# Altium PCB ESP32 with USBC PCB.PcbDoc
Units mil, origin at the board's own origin, x right, y up, seen from the top; angles counter-clockwise.
Board outline 2700 x 1000 mil, 4 copper layers (L1, L2, L3, L4), stack 61.583 mil thick; 64 components, 73 nets, 299 pads, 160 vias.
Unrouted connection lines stored in the file: 1.
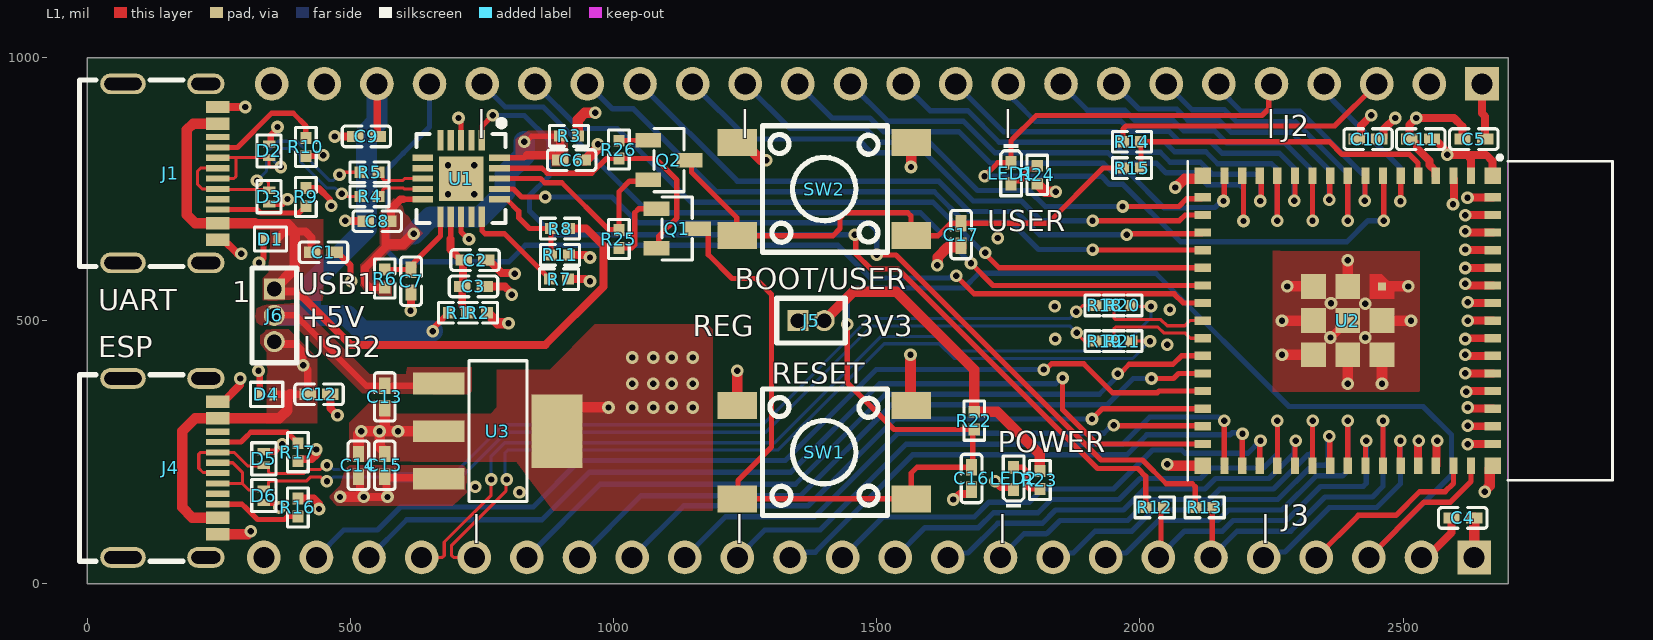
[diagram p0: L1 view]
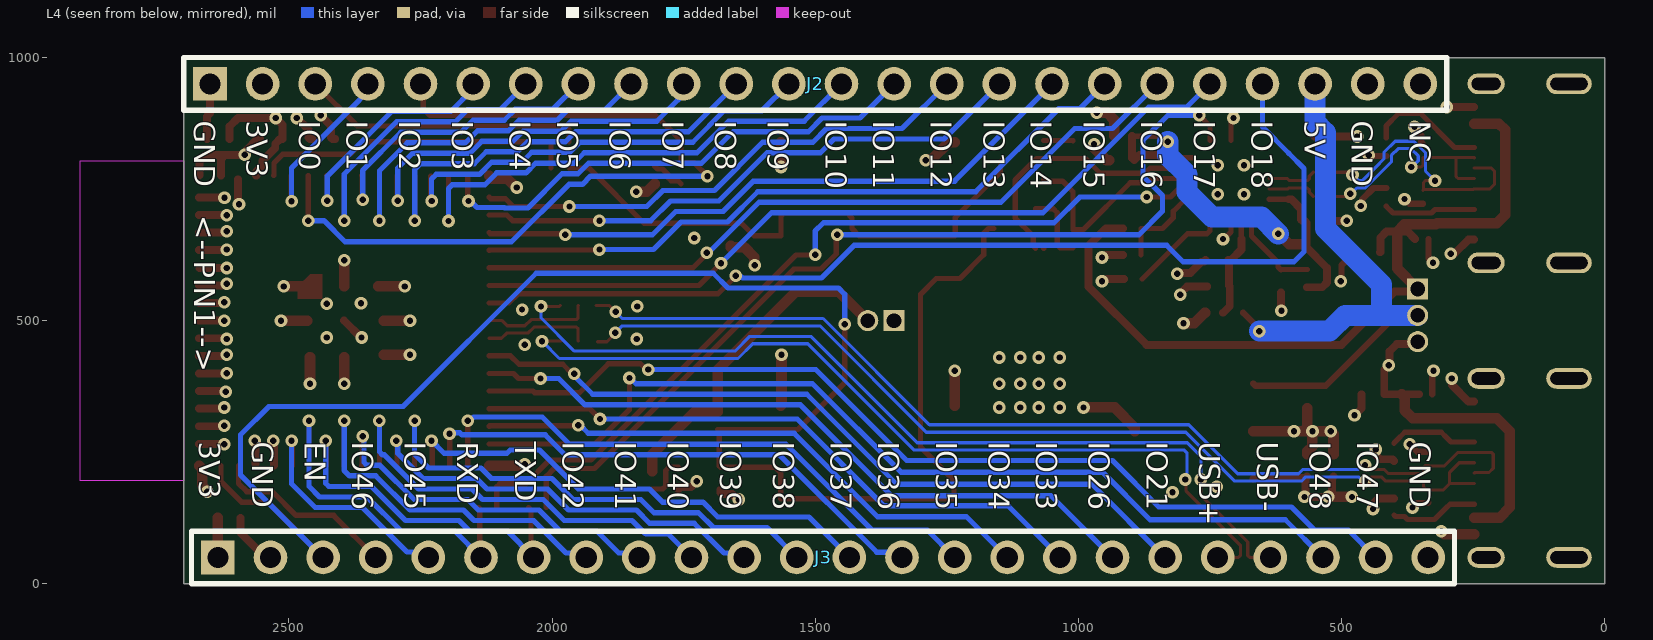
[diagram p1: L4 view, seen from below]
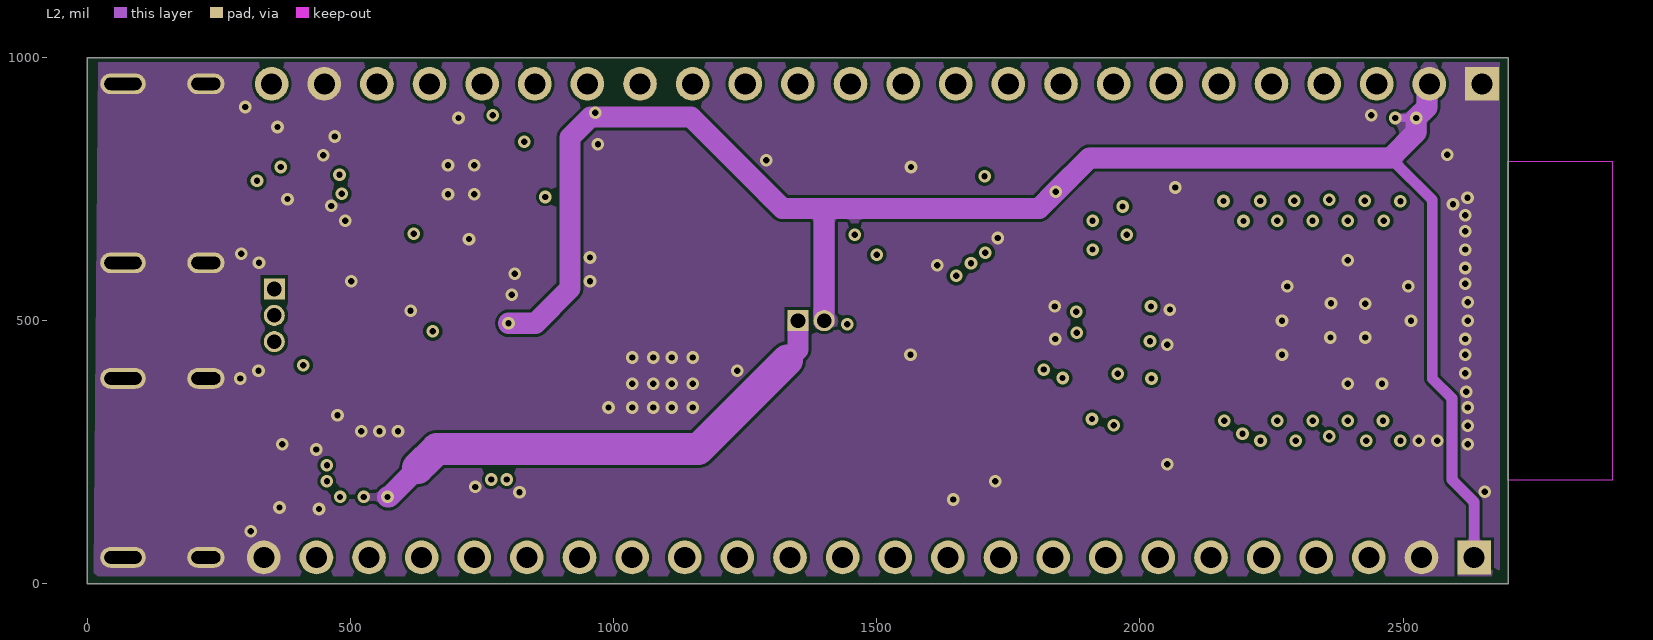
[diagram p2: L2]
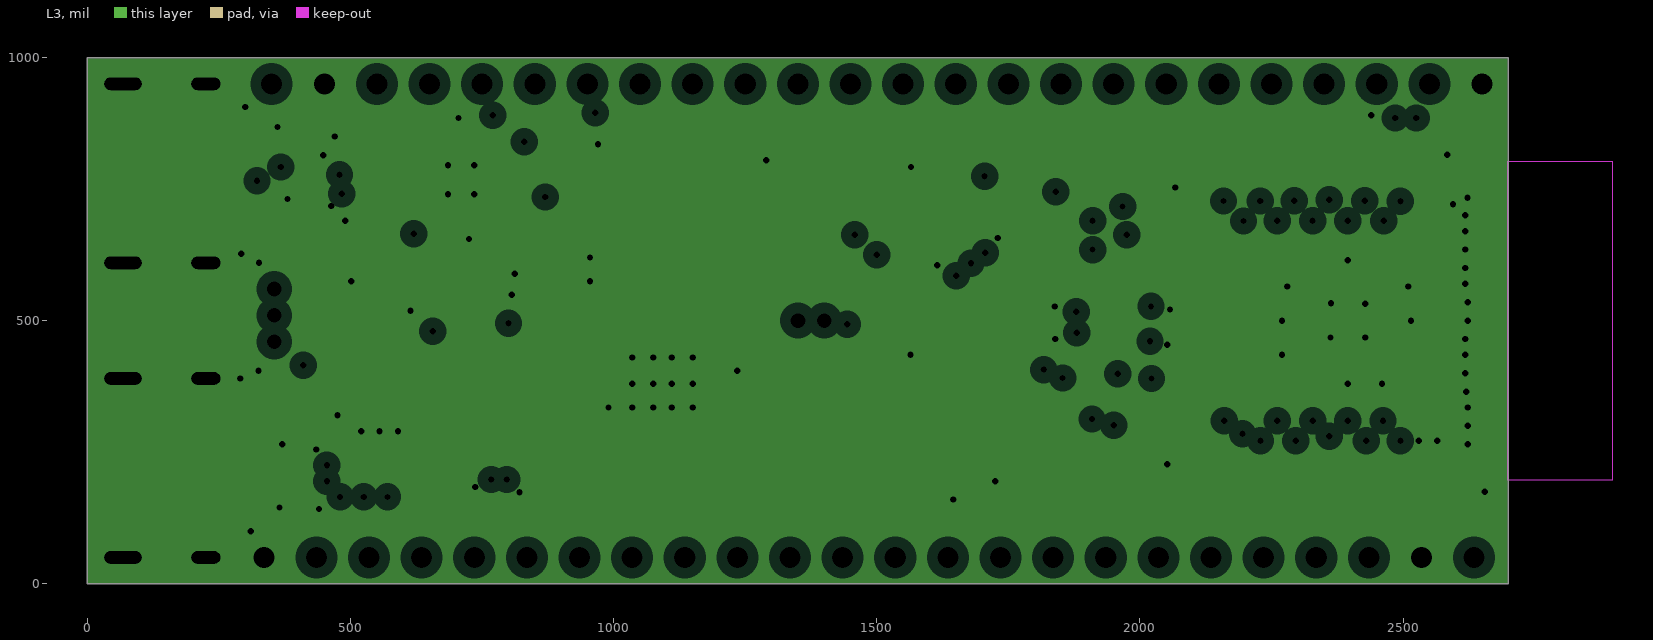
[diagram p3: L3, clearances drawn from the general rule]

## Layer stack, top to bottom
Top Solder: solder mask 0.4, Solder Resist, Dk 3.5
L1: signal copper 1.378
Dielectric 2: prepreg 3.9134, PP-006, Dk 4.1
L2: signal copper 0.5984
Dielectric 1: dielectric 49.8031, FR-4, Dk 4.8
L3: plane copper 0.5984, net GND
Dielectric 3: prepreg 3.9134, PP-006, Dk 4.1
L4: signal copper 1.378
Bottom Solder: solder mask 0.4, Solder Resist, Dk 3.5

## Board outline
0,0 2700,0 2700,1000 0,1000

## Design rules (kind name [scope] priority, off if disabled: settings)
Clearance [All] p1: gap=6 ignorepadtopadclearanceinfootprint=FALSE
Clearance USBC2 [WithinRoom('USBC2') or WithinRoom('USBC1')] p2: gap=6 ignorepadtopadclearanceinfootprint=FALSE
Clearance SMALLER [WithinRoom('FTDI')] p3: gap=6 ignorepadtopadclearanceinfootprint=FALSE
ComponentClearance ComponentClearance_1 [All] p1: gap=0 collisioncheckmode=3 verticalgap=0 showdistances=FALSE
ComponentClearance R18R20 [InComponent('R18') vs InComponent('R20')] p2: gap=0 collisioncheckmode=3 verticalgap=0 showdistances=FALSE
ComponentClearance R19R21 [InComponent('R19') vs InComponent('R21')] p3: gap=0 collisioncheckmode=3 verticalgap=0 showdistances=FALSE
ComponentClearance R1R2 [InComponent('R1') vs InComponent('R2')] p4: gap=0 collisioncheckmode=3 verticalgap=0 showdistances=FALSE
DiffPairsRouting DIFF90 [All] p1: maxlimit=10 minlimit=8 mostfreqgap=10 toplayer_maxgap=8.1 toplayer_prefgap=8 toplayer_minwidth=6.03 toplayer_maxwidth=6.23 toplayer_prefwidth=6.03 midlayer1_mingap=10 midlayer1_minwidth=15 midlayer1_maxwidth=15 midlayer1_prefwidth=15 bottomlayer_maxgap=8.1 bottomlayer_prefgap=8 bottomlayer_minwidth=6.03 bottomlayer_maxwidth=6.23 bottomlayer_prefwidth=6.03 maxuncoupledlength=500
MinimumSolderMaskSliver [All] p1: minsoldermaskwidth=3.15
PlaneClearance [All] p1: clearance=20
PlaneConnect [All] p1: pad.planeconnectstyle=Relief pad.reliefexpansion=20 pad.reliefentries=4 pad.reliefconductorwidth=20 pad.reliefairgap=10 via.planeconnectstyle=Direct via.reliefexpansion=20 via.reliefentries=4 via.reliefconductorwidth=10 via.reliefairgap=10
PolygonConnect [All] p1: connectstyle=Direct reliefconductorwidth=10 reliefentries=4 polygonreliefangle="90 Angle" airgapwidth=10
RoomDefinition FTDI [False vs False] p1: confinementstyle=ConfineIn formatcopy=TRUE lockcomponents=FALSE outline 600,880 820,880 820,665 600,665
RoomDefinition USBC1 [False vs False] p2: confinementstyle=ConfineIn formatcopy=TRUE lockcomponents=FALSE outline 205,925 295,925 295,625 205,625
RoomDefinition USBC_1 [False vs False] p3: confinementstyle=ConfineIn formatcopy=TRUE lockcomponents=FALSE outline 200,370 300,370 300,65 200,65
RoutingVias [All] p1: holewidth=12 width=24 viastyle="Through Hole" minholewidth=12 minwidth=24 maxholewidth=12 maxwidth=24
SilkToSilkClearance [All] p1: silktosilkclearance=6
SilkToSolderMaskClearance [IsPad] p1: minsilkscreentomaskgap=6 clearancetoexposedcopper=TRUE
SolderMaskExpansion [All] p1: expansion=2 istentingtop=FALSE
SupplyNets "Schematic Supply Nets_5" [InNet('+5V')] p1: voltage=0.000
SupplyNets "Schematic Supply Nets_4" [InNet('GND')] p2: voltage=0.000
SupplyNets "Schematic Supply Nets_3" [InNet('+5V_VBUS2')] p3: voltage=0.000
SupplyNets "Schematic Supply Nets_2" [InNet('+3V3')] p4: voltage=0.000
SupplyNets "Schematic Supply Nets_1" [InNet('+3V3_REG')] p5: voltage=0.000
SupplyNets "Schematic Supply Nets" [InNet('+5V_VBUS1')] p6: voltage=0.000
Width [All] p1: maxlimit=100 minlimit=10 preferedwidth=10 minimp=50.000000 maximp=50.000000 favimp=50.000000
23 further rules are at their usual default settings.

## Classes and differential pairs
differential pair class DIFF90: CON1_USB CON2_USB CON_ESP_USB ESP_USB FTDI_USB
differential pair FTDI_USB: +FTDI_USB_P -FTDI_USB_N
differential pair ESP_USB: +ESP_USB_P -ESP_USB_N
differential pair CON_ESP_USB: +CON_ESP_USB_P -CON_ESP_USB_N
differential pair CON2_USB: +CON2_USB_P -CON2_USB_N
differential pair CON1_USB: +CON1_USB_P -CON1_USB_N

## Components (designator, comment, footprint, x,y, rotation, side; value= is the part's Value field where it differs from the comment)
C1 "100nF" C0402 448.46,630 r180 top
C2 "100nF" C0402 736.46,615 r180 top
C3 "4.7uF" C0402 733.54,565 r180 top
C4 "100nF" C0402 2613.54,125 r0 top
C5 "100nF" C0402 2634.54,845 r180 top
C6 "100nF" C0402 920,805 r180 top
C7 "100nF" C0402 615,575 r90 top
C8 "100nF" C0402 550.46,689 r0 top
C9 "100nF" C0402 530,850 r0 top
C10 "10uF,10V" C0402 2433.54,845 r0 top
C11 "100nF" C0402 2533.54,845 r180 top
C12 "100nF" C0402 440,360 r180 top
C13 "4.7uF" C0402 565,355 r90 top
C14 "10uF,10V" C0402 515,225 r270 top
C15 "10uF,10V" C0402 565,225 r270 top
C16 "1uF,35V" C0402 1680,200 r90 top value=1uF
C17 "100nF" C0402 1660,663.54 r90 top
D1 "AQ3045-01ETG" SOD882 347.2,655 r180 top
D2 "AQ3045-01ETG" SOD882 345,822.8 r90 top
D3 "AQ3045-01ETG" SOD882 345,735 r270 top
D4 "AQ3045-01ETG" SOD882 340,360 r180 top
D5 "AQ3045-01ETG" SOD882 335,237.8 r90 top
D6 "AQ3045-01ETG" SOD882 335,167.2 r270 top
J1 "2171790001" USB-C-SMD_2171790001 157.6,779.92 r270 top locked
J2 "0022284245" HDR_1X24_2.54MM 2650,950 r90 bottom locked
J3 "0022284245" HDR_1X24_2.54MM 2635.03,50 r90 bottom locked
J4 "2171790001" USB-C-SMD_2171790001 157.58,220.08 r270 top locked
J5 "FTS-102-01-F-S" HDR_1X2_1.27MM 1375,500 r90 top locked
J6 "FTS-103-01-F-S" HDR_1X3_1.27MM 355,510 r0 top locked
LED1 "RED" LED0402-RD_RED 1755,780 r270 top
LED2 "VLMG1500-GS08" LED0402-RD_GREEN 1760,200 r90 top
Q1 "SS8050-G(RANGE:120-200)" SOT-23-3_L2.9-W1.3-P1.90-LS2.4-BR 1120.63,675 r180 top
Q2 "SS8050-G(RANGE:120-200)" SOT-23-3_L2.9-W1.3-P1.90-LS2.4-BR 1105,805 r180 top
R1 "0Ω" R0402 704.08,515 r0 top
R2 "0Ω" R0402 742.04,515 r180 top
R3 "0Ω" R0402 915.04,851 r180 top
R4 "27Ω" R0402 535.96,736 r0 top
R5 "27Ω" R0402 535.96,782 r0 top
R6 "0Ω" R0402 565,580 r90 top
R7 "10kΩ" R0402 896.04,579 r180 top
R8 "4.7kΩ" R0402 897.96,675 r0 top
R9 "5.1kΩ" R0402 415,735 r270 top
R10 "5.1kΩ" R0402 415,830 r90 top
R11 "10kΩ" R0402 897.96,625 r180 top
R12 "0Ω" R0402 2027.96,145 r180 top
R13 "0Ω" R0402 2122.96,145 r180 top
R14 "27Ω" R0402 1985,840 r0 top
R15 "27Ω" R0402 1985,790 r0 top
R16 "5.1kΩ" R0402 400,145 r270 top
R17 "5.1kΩ" R0402 400,250 r90 top
R18 "0Ω" R0402 1932.92,529 r0 top
R19 "0Ω" R0402 1932.92,461 r0 top
R20 "0Ω" R0402 1967,529 r180 top
R21 "0Ω" R0402 1967,461 r180 top
R22 "10kΩ" R0402 1685,310 r90 top
R23 "1kΩ" R0402 1810,197 r90 top
R24 "1kΩ" R0402 1805,777.04 r270 top
R25 "10kΩ" R0402 1010,655 r90 top
R26 "10kΩ" R0402 1010,825 r270 top
SW1 "PTS645SH50SMTR92LFS" KEY-SMD_4P-L6.0-W6.0-P4.50-LS9.0 1400,250 r180 top locked
SW2 "PTS645SH50SMTR92LFS" KEY-SMD_4P-L6.0-W6.0-P4.50-LS9.0 1400,750 r180 top locked
U1 "FT231XQ-R" QFN-20_L4.0-W4.0-P0.50-BL-EP2.2 710,770 r180 top locked
U2 "ESP32-S3-MINI-1-N8" XCVR_ESP32-S3-MINI-1-N8 2395.04,500 r270 top locked
U3 "TL1963A-33DCYR" SOT-223_L6.5-W3.5-P2.30-LS7.0-BR 780,290 r180 top locked

## Footprints (in the part's own frame and the unit in brackets; to place one, negate y for a bottom-side part, rotate by r counter-clockwise, add the part's x,y. Pads: shape width x height; smd on the part's side, far side on the other; paste and mask are expansions set on the pad)
C0402 [mm]
  rect 0.79x0.54 smd paste-100 mask+0.051: 1(-0.545,0) 2(0.545,0)
  silkscreen extent -1.17,-0.5 1.17,0.5
HDR_1X2_1.27MM [mil]
  rect 40x40 hole 28: 1(0,25)
  round 40 hole 28: 2(0,-25)
  silkscreen extent -43,-65 43,65, body extent -42,-50 42,50, height 155
HDR_1X3_1.27MM [mil]
  rect 40x40 hole 28: 1(0,50)
  round 40 hole 28: 2(0,0) 3(0,-50)
  silkscreen extent -42,-90 42,90, body extent -42,-75 42,75, height 155
HDR_1X24_2.54MM [mil]
  rect 64x64 hole 40: 1(0,0)
  round 64 hole 40: 2(0,-100) 3(0,-200) 4(0,-300) 5(0,-400) 6(0,-500) 7(0,-600) 8(0,-700) 9(0,-800) 10(0,-900) 11(0,-1000) 12(0,-1100) 13(0,-1200) 14(0,-1300) 15(0,-1400) 16(0,-1500) 17(0,-1600) 18(0,-1700) 19(0,-1800) 20(0,-1900) 21(0,-2000) 22(0,-2100) 23(0,-2200) 24(0,-2300)
  silkscreen extent -50,-2350 50,50, body extent -49,-2350 49,50, height 385
KEY-SMD_4P-L6.0-W6.0-P4.50-LS9.0 [mm]
  rect 1.9x1.3 smd: 1(-4.2,2.25) 2(4.2,2.25) 3(-4.2,-2.25) 4(4.2,-2.25)
  silkscreen extent -3.05,-3.05 2.98,3.05, body extent -4.5,-3 4.5,3, height 4.81
LED0402-RD_GREEN [mm]
  rect 0.636x0.54 smd paste-100 mask+0.051: 1(-0.538,0) 2(0.538,0)
  silkscreen extent -1.39,-0.54 1.09,0.54
LED0402-RD_RED [mm]
  rect 0.636x0.54 smd paste-100 mask+0.051: 1(-0.508,0) 2(0.508,0)
  silkscreen extent -1.39,-0.54 1.09,0.54
QFN-20_L4.0-W4.0-P0.50-BL-EP2.2 [mm]
  rect 0.3x1 smd paste-100 mask+0.051: 1(-1,-1.85) 2(-0.5,-1.85) 3(0,-1.85) 4(0.5,-1.85) 5(1,-1.85) 11(1,1.85) 12(0.5,1.85) 13(0,1.85) 14(-0.5,1.85) 15(-1,1.85)
  rect 1x0.3 smd paste-100 mask+0.051: 6(1.85,-1) 7(1.85,-0.5) 8(1.85,0) 9(1.85,0.5) 10(1.85,1) 16(-1.85,1) 17(-1.85,0.5) 18(-1.85,0) 19(-1.85,-0.5) 20(-1.85,-1)
  rect 2.15x2.15 smd paste-100 mask+0.051: 21(0,0)
  silkscreen extent -2.15,-2.82 2.15,2.15, body extent -2,-2 2,2, height 0.76
R0402 [mm]
  rect 0.566x0.54 smd paste-100 mask+0.051: 1(-0.433,0) 2(0.433,0)
  silkscreen extent -0.94,-0.5 0.94,0.5
SOD882 [mm]
  rect 0.35x0.6 smd: 1(-0.325,0) 2(0.325,0)
  silkscreen extent -0.79,-0.58 0.76,0.58
SOT-23-3_L2.9-W1.3-P1.90-LS2.4-BR [mm]
  rect 1.25x0.7 smd: 1(1,-0.95) 2(1,0.95) 3(-1,0)
  silkscreen extent -0.73,-1.53 0.73,1.53, body extent -1.2,-1.45 1.2,1.45, height 1.05
SOT-223_L6.5-W3.5-P2.30-LS7.0-BR [mm]
  rect 2.465x1.05 smd paste+0 mask+0.051: 1(2.858,-2.3) 2(2.857,0) 3(2.857,2.3)
  rect 2.465x3.54 smd paste+0 mask+0.051: 4(-2.857,0)
  silkscreen extent -1.4,-3.4 1.4,3.4, body extent -3.5,-3.25 3.5,3.25, height 1.71
USB-C-SMD_2171790001 [mm]
  rect 0.6x1.15 smd paste-100 mask+0.05: A1B12(-3.2,2.287) A4B9(-2.4,2.287) B1A12(3.2,2.287) B4A9(2.4,2.287)
  rect 0.3x1.15 smd paste-100 mask+0.05: A5(-1.25,2.287) A6(-0.25,2.287) A7(0.25,2.287) A8(1.25,2.287) B5(1.75,2.287) B6(0.75,2.287) B7(-0.75,2.287) B8(-1.75,2.287)
  oval 1x1.8 hole 0.6 slot 1.4 at 90 deg paste-2539.97 mask+0.05: S1(-4.32,1.712) S2(4.32,1.712)
  oval 1x2.2 hole 0.6 slot 1.8 at 90 deg paste-2539.97 mask+0.05: S3(-4.32,-2.287)
  oval 1x2.2 hole 0.6 slot 1.8 at 90 deg copper offset 0,0 paste-2539.97 mask+0.05: S4(4.32,-2.287)
  silkscreen extent -4.5,-4.39 4.5,0.6, body extent -4.47,-4.39 4.47,2.36, height 3.17
XCVR_ESP32-S3-MINI-1-N8 [mm]
  rect 0.8x0.4 smd: 1(-7,5.95) 2(-7,5.1) 3(-7,4.25) 4(-7,3.4) 5(-7,2.55) 6(-7,1.7) 7(-7,0.85) 8(-7,0) 9(-7,-0.85) 10(-7,-1.7) 11(-7,-2.55) 12(-7,-3.4) 13(-7,-4.25) 14(-7,-5.1) 15(-7,-5.95) 31(7,-5.95) 32(7,-5.1) 33(7,-4.25) 34(7,-3.4) 35(7,-2.55) 36(7,-1.7) 37(7,-0.85) 38(7,0) 39(7,0.85) 40(7,1.7) 41(7,2.55) 42(7,3.4) 43(7,4.25) 44(7,5.1) 45(7,5.95)
  rect 0.4x0.8 smd: 16(-5.95,-7) 17(-5.1,-7) 18(-4.25,-7) 19(-3.4,-7) 20(-2.55,-7) 21(-1.7,-7) 22(-0.85,-7) 23(0,-7) 24(0.85,-7) 25(1.7,-7) 26(2.55,-7) 27(3.4,-7) 28(4.25,-7) 29(5.1,-7) 30(5.95,-7) 46(5.95,7) 47(5.1,7) 48(4.25,7) 49(3.4,7) 50(2.55,7) 51(1.7,7) 52(0.85,7) 53(0,7) 54(-0.85,7) 55(-1.7,7) 56(-2.55,7) 57(-3.4,7) 58(-4.25,7) 59(-5.1,7) 60(-5.95,7)
  rect 1.2x1.2 smd: 61(0,0) 67(0,1.65) 68(1.65,1.65) 69(-1.65,0) 70(1.65,0) 71(-1.65,-1.65) 72(0,-1.65) 73(1.65,-1.65)
  rect 0.8x0.8 smd: 62(-7,7) 63(-7,-7) 64(7,-7) 65(7,7)
  rect 0.4x0.4 smd paste-1 mask+0: 66(-1.65,1.65)
  L1 region: -1.05,1.05 -2.25,1.05 -2.25,1.65 -1.65,2.25 -1.05,2.25
  Keep-Out Layer region: 7.7,7.725 -7.7,7.725 -7.7,12.775 7.7,12.775
  Keep-Out Layer region: 7.7,7.725 -7.7,7.725 -7.7,12.775 7.7,12.775
  silkscreen extent -7.97,-7.73 7.7,12.78, body extent -7.7,-7.71 7.7,12.79, height 2.56

## Part data
C1 C2 C4 C5 C6 C7 C8 C9 C11 C12 C17: library part 100nF,50V, "CAP CER 0.1UF 50V X7R 0402", JLCPCB Part Class="Extended Part", LCSC Part Number=C960916, Manufacturer=SAMSUNG(三星), Manufacturer Part=CL05B104KB5NNNC, Contributor=LCSC, nameAlias=Value, spicePre=C, spiceSymbolName=CL05B104KB5NNNC, Supplier=LCSC, Supplier Part=C960916
C3 C13: "CAP CER 4.7UF 16V X5R 0402", JLCPCB Part Class="Extended Part", LCSC Part Number=C318563, Manufacturer=SAMSUNG(三星), Manufacturer Part=CL05A475MO5NUNC, Contributor=LCSC, nameAlias=Value, spicePre=C, spiceSymbolName=CL05A475MO5NUNC, Supplier=LCSC, Supplier Part=C318563
C10 C14 C15: library part 10uF, "CAP CER 10UF 10V X5R 0402", JLCPCB Part Class="Extended Part", LCSC Part Number=C408132, Manufacturer=muRata(村田), Manufacturer Part=GRM155R61A106ME11D, Contributor=LCSC, nameAlias=Value, spicePre=C, spiceSymbolName=GRM155R61A106ME11D, Supplier=LCSC, Supplier Part=C408132
C16: library part CL05A105KL5NRNC, "CAP CER 1UF 35V X5R 0402", JLCPCB Part Class="Extended Part", LCSC Part Name="1uF ±10% 35V", LCSC Part Number=C307413, Manufacturer=SAMSUNG(三星), Tolerance=±10%, Add into BOM=yes, Convert to PCB=yes, Datasheet=https://atta.szlcsc.com/upload/public/pdf/source/20160218/1457707763339.pdf, Device=CL05A105KL5NRNC, Manufacturer Part=CL05A105KL5NRNC, Supplier=LCSC, Supplier Footprint=0402, Supplier Part=C307413, Symbol=CL05A105KL5NRNC
D1 D2 D3 D4 D5 D6: "TVS DIODE 5.3VWM 12VC SOD882", LCSC Part Number=C3710326
J1 J4: "CONN RCP USB2.0 TYP C 24P SMD RA", JLCPCB Part Class="Extended Part", LCSC Part Number=C3197684, Manufacturer=MOLEX, Add into BOM=yes, Convert to PCB=yes, Datasheet=https://www.molex.com/content/dam/molex/molex-dot-com/products/automated/en-us/salesdrawingpdf/217/217179/2171790001_sd.pdf?inline\, Device=2171790001, LCSC Part Name=2171790001, Manufacturer Part=2171790001, Supplier=LCSC, Supplier Footprint=SMD, Supplier Part=C3197684, Symbol=2171790001
J2 J3: "CONN HEADER VERT 24POS 2.54MM"
J5: "CONN HEADER VERT 24POS 2.54MM", LCSC Part Number=C6045317
J6: "CONN HEADER VERT 3POS 1.27MM", LCSC Part Number=C3333578
LED1: library part VLMS1500-GS08, "LED RED 0402 SMD", JLCPCB Part Class="Extended Part", Manufacturer=VISHAY(威世), Contributor=LCSC, Manufacturer Part=VLMS1500-GS08, spicePre=L, spiceSymbolName=VLMS1500-GS08, Supplier=LCSC, Supplier Part=C511370
LED2: "LED YLW-GRN 0402 SMD", Emitted Color=Green-yellow, Forward Current=20mA, Forward Voltage (VF)=2V, JLCPCB Part Class="Extended Part", LCSC Part Name=普绿/黄绿, Manufacturer=VISHAY(威世), Add into BOM=yes, Convert to PCB=yes, Datasheet=https://atta.szlcsc.com/upload/public/pdf/source/20200408/C511042_90D3007A8FB4E63E401D7A77D5F44EFD.pdf, Device=VLMG1500-GS08, Dominant Wavelength=571nm, Luminous Intensity=35mcd, Manufacturer Part=VLMG1500-GS08, Peak Wavelength=574nm, Supplier=LCSC, Supplier Footprint=0402, Supplier Part=C511404, Symbol=VLMG1500-GS08, Viewing Angle=130°
Q1 Q2: "TRANS NPN 25V 1.5A SOT-23-3", Current - Collector Cutoff=100nA, DC Current Gain=120@100mA,1V, JLCPCB Part Class="Extended Part", LCSC Part Name=L档(120-200), LCSC Part Number=C164886, Manufacturer=CJ(江苏长电/长晶), Operating Temperature=-55℃~+150℃, Pd - Power Dissipation=300mW, Transition frequency(fT)=100MHz, Add into BOM=yes, Convert to PCB=yes, Datasheet=https://atta.szlcsc.com/upload/public/pdf/source/20180130/C177739_15172974524031323483.pdf, Device=SS8050-G(RANGE:120-200), Manufacturer Part=SS8050-G(RANGE:120-200), Supplier=LCSC, Supplier Footprint=SOT-23, Supplier Part=C164886, Symbol=SS8050-G, type=NPN, Vce Saturation(VCE(sat))=500mV
R1 R2 R3 R6 R12 R13 R18 R19 R20 R21: "RES 0 OHM JUMPER 1/16W 0402", JLCPCB Part Class="Extended Part", LCSC Part Number=C106231, Manufacturer=YAGEO(国巨), Manufacturer Part=RC0402FR-070RL, nameAlias=Value, spicePre=R, spiceSymbolName=RC0402FR-070RL, Supplier=LCSC, Supplier Part=C106231
R4 R5 R14 R15: library part RC0402FR-0727RL, "RES 27 OHM 1% 1/16W 0402", JLCPCB Part Class="Extended Part", LCSC Part Name="厚膜电阻 27Ω ±1% 62.5mW", LCSC Part Number=C138021, Manufacturer=YAGEO(国巨), Operating Temperature Range=-55℃~+155℃, Temperature Coefficient=±100ppm/℃, Tolerance=±1%, Add into BOM=yes, Convert to PCB=yes, Datasheet=https://atta.szlcsc.com/upload/public/pdf/source/20181009/C309620_DA5935B6E1D48212CB7A533FE518B3C2.pdf, Device=RC0402FR-0727RL, Manufacturer Part=RC0402FR-0727RL, Supplier=LCSC, Supplier Footprint=0402, Supplier Part=C138021, Symbol=RC0402FR-0727RL, type="Thick Film Resistors"
R7 R11 R22 R25 R26: "RES SMD 10K OHM 1% 1/16W 0402", JLCPCB Part Class="Extended Part", LCSC Part Number=C144807, Manufacturer=YAGEO(国巨), Manufacturer Part=AC0402FR-0710KL, Contributor=LCSC, nameAlias=Value, spicePre=R, spiceSymbolName=AC0402FR-0710KL, Supplier=LCSC, Supplier Part=C144807
R8: "RES 4.7K OHM 1% 1/16W 0402", JLCPCB Part Class="Extended Part", LCSC Part Number=C105871, Manufacturer=YAGEO(国巨), Manufacturer Part=RC0402FR-074K7L, nameAlias=Value, spicePre=R, spiceSymbolName=RC0402FR-074K7L, Supplier=LCSC, Supplier Part=C105871
R9 R10 R16 R17: library part AC0402FR-075K1L, "RES SMD 5.1K OHM 1% 1/16W 0402", JLCPCB Part Class="Extended Part", LCSC Part Name="厚膜电阻 5.1kΩ ±1% 62.5mW", LCSC Part Number=C144745, Manufacturer=YAGEO(国巨), Operating Temperature Range=-55℃~+155℃, Temperature Coefficient=±100ppm/℃, Tolerance=±1%, Add into BOM=yes, Convert to PCB=yes, Datasheet=https://atta.szlcsc.com/upload/public/pdf/source/20180927/C229861_4ABDC471507C1ED6AFB4BA66AFC8620A.pdf, Device=AC0402FR-075K1L, Manufacturer Part=AC0402FR-075K1L, Supplier=LCSC, Supplier Footprint=0402, Supplier Part=C144745, Symbol=AC0402FR-075K1L, type="Thick Film Resistors"
R23 R24: "RES 1K OHM 1% 1/16W 0402", JLCPCB Part Class="Extended Part", LCSC Part Number=C106235, Manufacturer=YAGEO(国巨), Manufacturer Part=RC0402FR-071KL, nameAlias=Value, spicePre=R, spiceSymbolName=RC0402FR-071KL, Supplier=LCSC, Supplier Part=C106235
SW1 SW2: "Tactile Switch SPST-NO Top Actuated Surface Mount", Contact Current=50mA, JLCPCB Part Class="Extended Part", LCSC Part Name="6*6*5mm 立贴 轻触开关", LCSC Part Number=C221869, Manufacturer=C&K, Operating Force=200gf, Operating Temperature=-40℃~+85℃, Voltage Rating (DC)=12V, Actuator Style="Round Button", Add into BOM=yes, Circuit=SPST, Convert to PCB=yes, Datasheet=https://atta.szlcsc.com/upload/public/pdf/source/20190108/C285530_E89B379DE8DD14E424006A6061D0203A.pdf, Device=PTS645SH50SMTR92LFS, Manufacturer Part=PTS645SH50SMTR92LFS, Mechanical Life=-, Mounting Style="Standing paste", Pin Style=Gullwing, Supplier=LCSC, Supplier Footprint=SMD,6x6mm, Supplier Part=C221869, Switch Height=5mm, Switch Length=6mm, Switch Width=6mm, Symbol=PTS645SH50SMTR92LFS, With Lamp=-
U1: "IC USB SERIAL FULL UART 20QFN", JLCPCB Part Class="Extended Part", LCSC Part Name="FT231X USB至全握手UART IC", LCSC Part Number=C132159, Manufacturer=FTDI(飞特帝亚), Operating Temperature=-40℃~+85℃, Voltage - Supply=3.3V~5V, Add into BOM=yes, Applications Function="USB to UART", Convert to PCB=yes, Datasheet=https://atta.szlcsc.com/upload/public/pdf/source/20171113/C132160_15105610735521115430.pdf, Device=FT231XQ-R, Manufacturer Part=FT231XQ-R, Protocol=-, Supplier=LCSC, Supplier Footprint=QFN-20-EP(4x4), Supplier Part=C132159, Symbol=FT231XQ-R
U2: LCSC Part Number=C2913206
U3: "IC REG LIN 3.3V 1.5A SOT-223-4", JLCPCB Part Class="Extended Part", LCSC Part Number=C181262, Manufacturer=TI(德州仪器), Contributor=LCSC, Manufacturer Part=TL1963A-33DCYR, spicePre=U, spiceSymbolName=TL1963A-33DCYR, Supplier=LCSC, Supplier Part=C181262

## Via types
v1: diameter 24, hole 12, L1 to L4, tented both sides, 160 vias

## Nets (pads, with @x,y where several pads share a name; then routed paths per layer and width w, separated by ;. In a path a pad name is that pad's centre, name@x,y a point inside that pad or via, vN(x,y) a via of type N, cw(c..) or ccw(c..) an arc to the next point about the centre after c; other vN are vias at no path point)
+3V3: C4.2 C5.2 C10.2 C11.2 J2.2 J3.1 J5.2 R2.1 R3.1 R22.2 R23.2 R24.2 U2.3 | length 4555.4
  L1 w15: C10.2 2459.92,845 2463.05,848.13 2463.05,863.05 v1(2485,885) ; U2.3 2561.99,775.96 2561.99,783.84 2550.27,795.56 2550.27,803.89 2525.95,828.22 2525.95,836.06 2517,845 C11.2 2512.08,872.08 v1(2525,885) 2597,885 2612.66,869.34 2612.66,845.43 C5.2
  L1 w20: R2.1 759.58,515 779.58,495 v1(800,495) ; R3.1 932.08,882.08 945,895 v1(965,895) ; J5.2 1455,555 1537,555 1685,407 R22.2 1728.96,327.04 1810,246 R23.2 ; R24.2 1805,759.5 1805.63,758.86 1806.14,758.86 1820,745 v1(1840,745) ; J3.1 C4.2
  L2 w15: v1(2485,885) v1(2525,885)
  L2 w20: 2476,809 2555.51,729.49 2555.51,389.89 2593.01,352.39 2593.01,197.39 2635.03,155.38 J3.1
  L2 w40: v1(800,495) 851,495 917,561 917,848 956,887 1147,887 1321,713 1401,713 ; J5.2 1400,712 1401,713 ; J2.2 2545.41,945.41 2545.41,905.41 v1(2525,885) 2525,858 2476,809 1904,809 v1(1840,745) 1808,713 1401,713
+3V3_FTDI: C6.2 C8.2 R3.2 R6.1 U1.10 U1.20 | length 891.7
  L1 w10: v1(830,840) 833.79,840 844.29,850.5 897.5,850.5 R3.2 ; C6.2@893.62,805 C6.2@898,809.38
  L1 w10.01: U1.20 829.37,809.37 835,815
  L1 w10.1: 600,730.63 U1.10
  L1 w15: R6.1@565,563.47 536.32,563.47 527.53,572.25 527.53,591.53 527.6,591.6 527.6,600.5 566,638.9 ; 571.92,644.81 566,638.9 ; 600,730.63 594.99,730.63 576.64,712.28 576.64,692.13 573.51,689 569.13,689 566,685.87 566,638.9 ; 835,815 883.62,815 C6.2@893.62,805 ; C6.2@898,809.38 R3.2
  L1 w20: 571.92,644.81 598.73,644.81 618.92,665 v1(620,665)
  L4 w40: v1(620,665) 652,697 746,697 793.43,744.43 793.43,777.57 830,814.14 v1(830,840)
+3V3_REG: C14.2 C15.2 J5.1 U3.3 | length 1228.5
  L1 w15: C14.2 518.13,200.41 518.13,174.31 525,167.44 v1(525,165) v1(570,165) 570,167.44 568.13,169.31 568.13,200.41 C15.2 567.05,201.5 665.45,201.5 U3.3
  L1 w20: v1(480,165) v1(525,165)
  L2 w40: v1(570,165) 573,165 628,220 ; 1330,425 1350,445 J5.1
  L2 w60: 628,220 664,256 1161,256 1330,425
+5V: C9.2 C13.2 J2.22 J6.2 R1.1 U3.1 | length 1324
  L1 w12: J6.2 396,510 529.54,376.46 C13.2 663.41,376.46 U3.1 ; v1(656,480) 656,484.47 686.53,515 R1.1
  L1 w15: J2.22 550.73,949.27 550.73,850.73 C9.2
  L4 w40: J6.2 423.83,510 ; J2.22 550,877 530,857 530,675 423.83,568.83 423.83,510 ; v1(656,480) 522.66,480 492.66,510 423.83,510
+5V_VBUS1: C1.2 D1.1 J1.A4B9 J1.B4A9 J6.1 R8.2 | length 1545.6
  L1 w15: J6.1 360,555 399,555 500,454 870.06,454 980.5,564.44 980.5,642.06 947.56,675 R8.2 ; D1.1 374.16,669.16 394.14,669.16 414.12,669.16 425.84,657.45 425.84,630.63 426.47,630 C1.2
  L1 w20: J1.A4B9 200.72,874.41 189,862.7 189,701 204.57,685.43 J1.B4A9 317.82,685.43 320.44,682.81 380.49,682.81 394.14,669.16 394.14,599.14 J6.1
+5V_VBUS2: C12.2 D4.1 J4.A4B9 J4.B4A9 J6.3 | length 682.2
  L1 w15: D4.1 385.67,360 C12.2 418.54,406.46 v1(410,415) 408.28,416.72 408.28,441.72 394.78,455.22 359.78,455.22 J6.3
  L1 w20: J4.B4A9 199.41,125.59 180,145 180,290 204.57,314.57 J4.A4B9 364.57,314.57 380,330 380,354.33 385.67,360
+VCC_FTDI: C2.2 C3.2 R1.2 R2.2 U1.12 | length 202.4
  L1 w10.01: 690,655 690.31,655.31 U1.12
  L1 w15: 690,655 690,635.08 710.08,615 C2.2 713.54,613.54 713.54,566.46 C3.2 712.08,527.41 724.5,515 R2.2
BTN_GPIO0: C17.2 Q2.3 R15.1 SW2.1 SW2.2 | length 1036.8
  L1 w10: Q2.3 1147.92,801.45 1147.92,782.08 1233.85,696.15 1233.85,662.22 SW2.2 1416.42,661.42 1430,675 1430,695 1440,705 1558.87,705 1564.73,699.14 SW2.1@1564.73,661.42 ; SW2.1 1616.42,661.42 1640,685 C17.2 1825,685 1930,790 R15.1
CHIP_PU: C16.2 J3.3 Q1.3 R22.1 SW1.1 SW1.2 U2.45 | length 3524.2
  L1 w10: Q1.3 1170.83,675 1179.61,666.22 1179.61,625.39 1225,580 1270,580 1300,550 1300,260 1236.15,196.15 1236.15,162.92 SW1.2 SW1.1 1565.35,210.35 1576.46,221.46 C16.2 1682.5,223.96 1682.5,290.46 R22.1 1532.42,292.96 1444,381.38 v1(1444,493) ; J3.3 2540.03,155 2590,155 2629.29,194.29 U2.45
  L4 w10: v1(1444,493) 1444,550.21 1455.79,562 1665.65,562 1693.65,590 2030,590 2283,337 2538.19,337 2592.01,283.18 2592.01,206.98 J3.3
CON1_USB_N: D2.1 J1.A7 J1.B7 R4.1 | length 450.1
  L1 w6.03: J1.A7 278.47,770.08 282,773.61 282,809.73 ; J1.B7 247.93,809.73 282,809.73 ; v1(367,792) 348.53,792 345,795.53 D2.1 344.73,809.73 282,809.73 ; v1(483,741) 488,736 R4.1
  L4 w6.03: v1(367,792) 365.99,792 354.11,803.88 354.11,813.08 368.03,827 392,827 404.92,814.08 404.92,801.52 419.97,786.47 454.45,751.99 470.48,751.99 481.47,741 v1(483,741)
CON1_USB_P: D3.1 J1.A6 J1.B6 R5.1 | length 534.1
  L1 w6.03: J1.A6 214.76,789.76 209,784 209,759 217.61,750.39 J1.B6 248.95,749.09 343.7,749.09 D3.1 ; v1(322,766) 340.47,766 344,762.47 D3.1@344,748 ; v1(479,777) 484,782 R5.1@514.92,782
  L4 w6.03: v1(322,766) 340.08,784.08 340.08,818.89 362.22,841.03 397.81,841.03 418.95,819.89 418.95,807.33 434,792.28 460.27,766.01 466.48,766.01 477.47,777 v1(479,777)
CON2_USB_N: D5.1 J4.A7 J4.B7 R18.1 | length 1940.7
  L1 w6.03: J4.A7 246.58,211.29 219.49,211.29 211.39,219.39 211.39,246.08 214.92,249.61 J4.B7 278.39,249.61 304,224 334,224 D5.1 339.92,225 343.8,221.13 343.8,213.05 347.33,209.51 411.07,209.51 418.57,217.01 442.48,217.01 450.47,225 v1(455,225) ; v1(1879,517) 1879.86,517 1891.86,529 R18.1
  L4 w6.03: v1(455,225) 459.53,225 467.52,217.01 573.61,217.01 581.61,209.01 696.81,209.01 789.79,302 1283,302 1485.01,504.01 1866.51,504.01 1879,516.5 v1(1879,517)
CON2_USB_P: D6.1 J4.A6 J4.B6 R19.1 | length 1907.2
  L1 w6.03: J4.B6 294.45,190.55 ; J4.A6 276.08,229.92 294.45,211.55 294.45,190.55 ; v1(455,195) 450.47,195 442.48,202.99 424.38,202.99 416.88,195.49 347.33,195.49 343.8,191.95 343.8,183.87 339.92,180 D6.1 333,178 307,178 294.45,190.55 ; v1(1880,477) 1880,475.7 1895.7,460 R19.1@1913.88,460
  L4 w6.03: v1(455,195) 459.53,195 467.52,202.99 567.79,202.99 575.79,194.99 702.62,194.99 795.6,287.97 1288.81,287.97 1490.83,489.99 1866.51,489.99 1879.5,477 v1(1880,477)
CON_ESP_USB_N: J3.21 R20.1 | length 1715.6
  L1 w6.03: J3.21 674.48,50 678.01,53.53 678.01,79.29 767,168.28 v1(767,198) ; R20.1 1986.04,527 v1(2021,527)
  L4 w6.03: v1(767,198) 767,242.35 792.65,268 1306,268 1508.05,470.05 1624.39,470.05 1652.39,442.05 1957.5,442.05 2021,505.55 v1(2021,527)
CON_ESP_USB_P: J3.20 R21.1 | length 1659.1
  L1 w6.03: J3.20 695.57,50 692.04,53.53 692.04,73.48 795.52,176.95 795.52,196.52 v1(797,198) ; R21.1@1982.04,463 R21.1 v1(2019,461)
  L4 w6.03: v1(797,198) 793.56,201.44 793.56,231.35 793.56,249.07 798.46,253.97 1311.81,253.97 1513.86,456.01 1618.58,456.01 1646.58,428.01 1986.01,428.01 v1(2019,461)
CON_GPIO0: J2.3 R14.1 | length 541.7
  L1 w10: R14.1 1967.96,864.14 1973.82,870 2370,870 J2.3
DTR_FTDI: Q2.2 R25.2 U1.18 | length 405.7
  L1 w10: U1.18 860.97,770 868.97,762 901.18,762 990,673.18 1008.86,673.18 R25.2 1010,745 1030,765 1063.03,765 Q2.2
ESP_USB_N: R18.2 R20.2 U2.23 | length 203.3
  L1 w6.03: R20.2 1950.47,529 1950.47,505.55 1954,502.01 2039.91,502.01 2051.65,490.28 2085.28,490.28 2095,500 U2.23
ESP_USB_P: R19.2 R21.2 U2.24 | length 203.3
  L1 w6.03: R19.2 1950.47,461 1950.47,484.45 1954,487.99 2034.1,487.99 2045.83,476.25 2086.4,476.25 2096.12,466.54 U2.24
FTDI_RESET: C7.2 R6.2 U1.11 | length 174
  L1 w10: R6.2 614.42,597.04 C7.2 620.63,602.09 620.63,610.63 670.63,660.63 670.63,665 U1.11
FTDI_USB_N: R4.2 U1.9 | length 94.3
  L1 w6.03: R4.2 553.5,736 561.12,743.61 561.12,748.45 564.65,751.99 600,751.99 601.67,750.31 U1.9
FTDI_USB_P: R5.2 U1.8 | length 95.3
  L1 w6.03: R5.2 553.5,782 561.12,774.39 561.12,769.55 564.65,766.01 598.84,766.01 600,767.17 602.83,770 U1.8
GND: C1.1 C2.1 C3.1 C4.1 C5.1 C6.1 C7.1 C8.1 C9.1 C10.1 C11.1 C12.1 C13.1 C14.1 C15.1 C16.1 C17.1 D1.2 D2.2 D3.2 D4.2 D5.2 D6.2 J1.A1B12 J1.B1A12 J1.S1 J1.S2 J1.S3 J1.S4 J2.1 J2.23 J3.2 J3.24 J4.A1B12 J4.B1A12 J4.S1 J4.S2 J4.S3 J4.S4 LED2.1 R7.1 R9.1 R10.1 R11.1 R16.1 R17.1 SW1.3 SW1.4 SW2.3 SW2.4 U1.3 U1.13 U1.21 U2.1 U2.2 U2.42 U2.43 U2.46 U2.47 U2.48 U2.49 U2.50 U2.51 U2.52 U2.53 U2.54 U2.55 U2.56 U2.57 U2.58 U2.59 U2.60 U2.61 U2.62 U2.63 U2.64 U2.65 U2.66 U2.67 U2.68 U2.69 U2.70 U2.71 U2.72 U2.73 U3.2 U3.4 | length 4118.7
  L1 w10.01: v1(705,885) 710,880 U1.3 ; U1.13 710,668.31 723.31,655 v1(725,655)
  L1 w12: v1(325,405) 327.2,402.8 D4.2 ; v1(326,610) 334.41,618.41 D1.2 ; D6.2 335.89,153.52 356.48,153.52 v1(365,145) ; D5.2 355.59,250.59 v1(370,265) ; D3.2 371.2,722.2 v1(380,731) ; D2.2 347.61,835.59 348.5,836.48 348.5,852.25 361,864.75 v1(361,868) ; R9.1 438.97,752.04 460.7,730.31 460.7,720.3 v1(463,718) ; R10.1 446.96,812.96 v1(448,814) ; C1.1 474.84,630 499.84,605 499.84,576.16 v1(501,575)
  L1 w15: J4.A1B12 258.46,346.07 290,377.61 v1(290,390) ; J1.B1A12 258.48,653.94 285.42,627 v1(292,627) ; J1.A1B12 v1(299.91,905.91) v1@300,906 ; R16.1 430,162.04 440,152.04 v1(440,142.04) ; R17.1 400,233.47 403.13,236.59 426.21,236.59 435,245.38 v1(435,255) ; C12.1 461.46,333.54 v1(475,320) ; v1(470,850) C9.1 ; v1(490,690) 490.5,689.5 528.5,689.5 C8.1 ; v1(614,519) 614.5,519.5 614.5,553.04 C7.1 ; C3.1 793.05,565 804.28,553.77 804.28,550.72 v1(806,549) ; C2.1 761.05,611.87 765.97,611.87 787.12,590.72 810.28,590.72 v1(812,589) ; R7.1 946,579 950,575 v1(955,575) ; R11.1 947.56,625 952.56,620 v1(955,620) ; v1(1645,160) 1647.44,160 1657.92,170.49 1676.87,170.49 1680,173.62 C16.1 ; v1(1725,195) 1730,190 1736.16,183.84 1756.87,183.84 1760,180.71 LED2.1 ; v1(2362,468) 2363.04,468 U2.61 ; C10.1 2417,845 2420.14,848.13 2420.14,870.49 v1(2439.82,890.18) ; U2.42@2528.5,224.41 v1@2528.5,267.5 ; J3.2 2545,50 2592.08,97.08 C4.1 ; C11.1 2559.92,845 2582.28,822.65 2582.28,816.72 v1(2584,815) 2621,815 ; U2.43@2563.5,224.41 v1@2563.5,267.5 ; v1@2596.5,725.5 U2.2@2596.5,768.59 ; v1(2618,435.01) 2620.44,435.01 2622.37,433.07 U2.51 ; v1(2618,465.01) 2619.53,466.54 U2.52 ; v1(2618,570.01) 2620.44,570.01 2623.51,566.93 U2.55 ; v1(2618,600.01) 2657.23,600.01 U2.56@2670.24,600.02 ; v1(2618,635.01) 2619.15,633.86 U2.57 ; v1(2618,670.01) 2620.44,670.01 2623.12,667.32 U2.58 ; v1@2618.4,399.61 U2.50 ; v1@2618.78,700.79 U2.59 ; v1(2620,365) 2621.14,366.14 U2.49 ; v1(2623,335.01) 2625.44,335.01 2627.77,332.68 U2.48 ; v1(2623,500.01) U2.53 ; v1(2623,535.01) 2624.54,533.46 U2.54 ; v1@2623.25,734.25 U2.60 ; v1@2623.74,265.75 U2.46 ; v1@2623.8,299.21 U2.47 ; U2.1 2629.29,806.71 2621,815 ; J2.1 2650,894 2656,888 C5.1 ; U2.62 2670,776.22 2670,803 2658,815 2621,815
  L1 w20: J4.B1A12 304.1,94.1 v1(310,100) ; C14.1 515,283.92 520,288.92 v1(520,290) v1(555,290) ; C15.1 565,251.38 555.77,260.62 555.77,289.23 v1(555,290) ; C13.1 565,297.5 572.5,290 ; U3.2 v1(590,290) 572.5,290 ; U3.4 892.5,296.48 931.02,335 v1(990,335) ; C6.1 946.38,805 969.23,827.85 969.23,834.23 v1(970,835) ; SW1.4 1235,338.93 v1(1235,405) ; SW2.4 1246.46,838.58 1279.28,805.77 1289.23,805.77 v1(1290,805) ; v1(1564,435) 1564,339.93 SW1.3 ; v1(1565,792) 1565,838.23 SW2.3 ; v1(1615,605) 1615.77,605.77 1615.77,620.56 1634.34,639.13 1659.37,639.13 1660,639.76 C17.1 ; v1(2052,227) 2053.08,227 2055.67,224.41 U2.64 ; v1(2067,753) 2068.08,753 2084.92,769.84 2113.7,769.84 U2.63 ; v1(2270,435) U2.73@2320.06,434.98 ; v1(2270,500) U2.72@2320.06,499.98 ; v1(2280,565) U2.71@2330.02,564.98 ; v1(2395,380) U2.70@2395.02,430.06 ; U2.69@2394.98,564.94 v1(2395,615) ; U2.66@2459.94,565.02 v1(2510,565) ; v1(2460,380) U2.68@2460.02,430.06 ; U2.67@2464.94,500.02 v1(2515,500) ; v1(2655,175) 2655,176.08 2664.88,185.96 2664.88,218.66 U2.65 ; v1(555,290) 572.5,290
  other v1: 821,174 737,184 2623,265.01 2530.01,272 2565.01,272 2623,300.01 1035,335 1075,335 1110,335 1150,335 1035,380 1075,380 1110,380 1150,380 2618,400.01 1035,430 1075,430 1110,430 1150,430 2052,454 1839,465 2428,468 2057,521 1838,527 2428,532 2363,533 1730,657 2618,700.01 2594.99,721 2622.5,733.5 685,740 735,740 685,795 735,795
GPIO0: R14.2 R15.2 U2.4 | length 617.3
  L1 w10: R15.2 R14.2 2360,840 2384,816 2512,816 2528.24,799.76 2528.24,776.25 U2.4
GPIO1: J2.4 U2.5 | length 332.2
  L1 w10: v1@2495.43,726.43 U2.5
  L4 w10: J2.4 2350,935.39 2365.73,919.65 2365.73,919.27 2495,790 v1(2495,727)
GPIO2: J2.5 LED1.1 U2.6 | length 1579.3
  L1 w10: v1(1704.77,774.51) 1704.77,774.77 1730.01,800.01 LED1.1 1755,842 1803,890 2232,890 2245,903 2245,945 J2.5 ; v1(2463.07,690) U2.6@2463.09,775.57
  L4 w10: v1(1704.77,774.51) 1926.78,774.51 1942.29,759 1968,759 2077,650 2393.18,650 2433.18,690 v1(2463.07,690)
GPIO3: J2.6 U2.7 | length 450.6
  L1 w10: v1(2427,728) 2427.75,728.75 2427.75,774.84 U2.7
  L4 w10: J2.6 2150,940 2192,898 2304,898 2427,775 v1(2427,728)
GPIO4: J2.7 U2.8 | length 590.3
  L1 w10: v1(2395,690) U2.8
  L4 w10: J2.7 2099.14,900.86 2160.86,900.86 2183.72,878 2295.72,878 2395,778.72 v1(2395,690)
GPIO5: J2.8 U2.9 | length 579.8
  L1 w10: v1(2360,730) 2360.79,730.79 2360.79,774.8 U2.9
  L4 w10: J2.8 1998,902 2069.72,902 2090.86,880.86 2150,880.86 2172.86,858 2287.43,858 2360,785.43 v1(2360,730)
GPIO6: J2.9 U2.10 | length 726.9
  L1 w10: v1(2328.07,690) U2.10
  L4 w10: J2.9 1900,900 1971,900 1990,881 2062.43,881 2082.57,860.86 2141.72,860.86 2164.57,838 2275,838 2328.07,784.93 v1(2328.07,690)
GPIO7: J2.10 U2.11 | length 726.1
  L1 w10: v1@2294.65,732.5 U2.11
  L4 w10: J2.10 1760.33,939.67 1760.33,919.67 1801,879 1963.72,879 1982.72,860 2055.15,860 2074.29,840.86 2133.43,840.86 2156.29,818 2265,818 2293.14,789.86 v1(2293.14,728)
GPIO8: J2.11 U2.12 | length 861.1
  L1 w10: v1@2261.16,690.02 U2.12
  L4 w10: J2.11 1741,859 1955.43,859 1974.43,840 2046.86,840 2066.01,820.86 2125,820.86 2147.86,798 2250,798 2261.14,786.86 v1(2261.14,690)
GPIO9: J2.12 U2.13 | length 838.6
  L1 w10: v1@2230.39,731.91 U2.13@2230.39,775
  L4 w10: J2.12 1601,899 1672.72,899 1732.72,839 1947.15,839 1966.15,820 2038.58,820 2057.72,800.86 2115,800.86 2137.86,778 2220,778 2228.89,769.11 v1(2228.89,727.41)
GPIO10: J2.13 U2.14 | length 976.5
  L1 w10: v1(2196.89,689.41) U2.14@2196.91,774.98
  L4 w10: J2.13 1521,879 1664.43,879 1724.43,819 1938.86,819 1958.86,799 2031.29,799 2049.44,780.86 2105,780.86 2127.86,758 2190,758 2196.89,751.11 v1(2196.89,689.41)
GPIO11: J2.14 U2.15 | length 955.3
  L1 w10: v1@2160.39,731.91 U2.15@2160.39,775
  L4 w10: J2.14 1415,885 1486.72,885 1512.72,859 1656.15,859 1716.15,799 1930.58,799 1950.58,779 1980.82,779 2045.82,714 2089.91,714 2090.91,715 2142.69,715 2155.1,727.41 v1(2158.89,727.41)
GPIO12: J2.15 U2.16 | length 973.1
  L1 w10: v1(1967,717) 2074,717 2088.7,731.7 2116.9,731.7 U2.16
  L4 w10: J2.15 1335,865 1478.43,865 1504.43,839 1600,839 1691.49,747.51 1789.49,747.51 1820,717 v1(1967,717)
GPIO13: J2.16 U2.17 | length 1081.6
  L1 w10: v1(1910,690) 2075.28,690 2086.07,700.79 U2.17
  L4 w10: J2.16 1255,845 1464,845 1490,819 1591.72,819 1683.2,727.51 1775,727.51 1812.51,690 v1(1910,690)
GPIO14: J2.17 U2.18 | length 1190.1
  L1 w10: v1(1975,663) 1977.16,665.16 2117.29,665.16 U2.18
  L4 w10: J2.17 1235,765 1617.43,765 1674.92,707.51 1765,707.51 1809.51,663 v1(1975,663)
GPIO15: J2.18 U2.19 | length 1300.4
  L1 w10: v1(1910,635) 1910.57,634.43 2118.88,634.43 U2.19
  L4 w10: J2.18 997.5,902.5 1037.5,902.5 1195,745 1609.15,745 1666.64,687.51 1755,687.51 1807.51,635 v1(1910,635)
GPIO16: J2.19 U2.20 | length 1415.6
  L1 w10: v1(1706,629) 1706,626.79 1732.39,600.39 U2.20
  L4 w10: J2.19 935,865 1006.72,865 1146.72,725 1606.52,725 1702.52,629 v1(1706,629)
GPIO17: J2.20 U2.21 | length 1528.1
  L1 w10: v1(1679,609) 1721.07,566.93 U2.21
  L4 w10: J2.20 794,906 866,906 1067,705 1583,705 v1(1679,609)
GPIO18: J2.21 U2.22 | length 1969.6
  L1 w10: v1(1651,585) 1685.07,550.93 2065.07,550.93 2082.54,533.46 U2.22
  L4 w10: J2.21 650,880 650,868 600,818 571,789 571,631 590,612 801,612 832,643 1426.19,643 1488.19,581 1638.14,581 1639.46,582.32 1648.32,582.32 v1(1651,585)
GPIO21: J3.19 U2.25 | length 1445.3
  L1 w10: v1(1958,399) 1961.79,399 1979.79,417 2062.72,417 2078.79,433.07 U2.25
  L4 w10: J3.19 974.03,189 1345,189 1516,360 1922.79,360 1958,395.21 v1(1958,399)
GPIO26: J3.18 U2.26 | length 1329.2
  L1 w10: v1(2022,390) 2064,390 2073.61,399.61 U2.26
  L4 w10: J3.18 1052.39,167.36 1355.36,167.36 1528,340 1937.18,340 1987.18,390 v1(2022,390)
GPIO33: J3.17 U2.28 | length 1201.5
  L1 w10: v1(1909,313) 1928.68,332.68 U2.28
  L4 w10: J3.17 1133.03,148 1369,148 1534,313 v1(1909,313)
GPIO34: J3.16 U2.29 | length 1089.1
  L1 w10: v1(1950,301) 1950.89,300.11 2118.56,300.11 U2.29
  L4 w10: J3.16 1212.39,127.36 1381.36,127.36 1540,286 1931.21,286 1946.21,301 v1(1950,301)
GPIO35: J3.15 U2.31 | length 1124.4
  L1 w10: v1(2160,310) 2160.39,309.61 2160.39,224.8 U2.31
  L4 w10: J3.15 1287.03,102 1392.27,102 1555.27,265 1966.72,265 2018.72,317 2149.21,317 2156.21,310 v1(2160,310)
GPIO36: J3.14 U2.32 | length 1019.7
  L1 w10: U2.32 2194.63,224.78 2194.63,284.63 v1(2195,285)
  L4 w10: J3.14 1345.03,60 1383,60 1568,245 1975,245 2013,283 2171.18,283 2175,286.82 2193.18,286.82 v1(2195,285)
GPIO37: J3.13 U2.33 | length 934.2
  L1 w10: U2.33 v1@2227.72,267.5
  L4 w10: J3.13 1511.67,126.64 1685.07,126.64 1713.43,155 1790,155 1815,180 1950,180 2024,254 2079.47,254 2085.47,248 2205.22,248 v1(2229.22,272)
GPIO38: J3.12 U2.34 | length 956.8
  L1 w10: U2.34 v1(2261.22,310)
  L4 w10: J3.12 1591.67,106.64 1693.36,106.64 1721.72,135 1806.43,135 1831.43,160 1960.15,160 2000.15,200 2115.32,200 2135.32,220 2235,220 2261.22,246.22 v1(2261.22,310)
GPIO39: J3.11 U2.35 | length 808.6
  L1 w10: U2.35 v1@2294.65,267.5
  L4 w10: J3.11 1643.27,58.25 1673.25,58.25 1730,115 1814.72,115 1839.72,140 1968.43,140 2008.43,180 2123.6,180 2143.6,200 2245.29,200 2293.47,248.18 2293.47,269.32 v1(2296.15,272)
GPIO40: J3.10 U2.36 | length 820.9
  L1 w10: U2.36 v1(2328.15,310)
  L4 w10: J3.10 1780.03,95 1821.46,95 cw(c1835.03,50) 1823.59,95.59 1848,120 1976.72,120 2016.72,160 2131.89,160 2151.89,180 2253.58,180 2318.58,245 2322.29,245 2328.15,250.86 v1(2328.15,310)
GPIO41: J3.9 U2.37 | length 703.7
  L1 w10: v1(2360,280) 2360.79,279.21 2360.79,225.2 U2.37
  L4 w10: J3.9 1843.27,58.25 1873.25,58.25 1915,100 1985,100 2025,140 2140.17,140 2160.17,160 2261.86,160 2326.86,225 2351.46,225 2357.32,230.86 2357.32,277.32 v1(2360,280)
GPIO42: J3.8 U2.38 | length 708.9
  L1 w10: U2.38@2395.06,224.43 v1(2395.08,310)
  L4 w10: J3.8 1943.27,58.25 1973.25,58.25 2035,120 2148.46,120 2168.46,140 2270.15,140 2335.15,205 2385,205 2395.08,215.08 v1(2395.08,310)
GPIO45: J3.5 U2.41 | length 443.1
  L1 w10: U2.41@2493.5,224.41 v1@2493.5,267.5
  L4 w10: J3.5 2245.36,60.33 2275.33,60.33 2360,145 2450,145 2495.01,190.01 v1(2495.01,272)
GPIO46: J3.4 U2.44 | length 352.7
  L1 w10: J3.4 2415.03,130 2486.74,130 2531.74,175 2580,175 2595.83,190.83 U2.44
GPIO47: J3.23 U2.27 | length 1860.9
  L1 w10: v1(1817,407) 1820.79,407 1831.79,418 1893,418 1948,363 2033.18,363 2036.33,366.14 U2.27
  L4 w10: J3.23 487.03,102 551,102 595,146 847,146 935,234 1326,234 1499,407 v1(1817,407)
GPIO48: J3.22 U2.30 | length 1812.8
  L1 w10: v1(1853,391) 1853,330.82 1918.07,265.75 U2.30
  L4 w10: J3.22 606.66,121.63 863.63,121.63 954,212 1337,212 1505,380 1840.14,380 1851.14,391 v1(1853,391)
NetJ1_A5: J1.A5 R10.2 | length 227.1
  L1 w10: J1.A5 285.13,829.13 350,894 391,894 415,870 R10.2
NetJ1_B5: J1.B5 R9.2 | length 176.1
  L1 w10: J1.B5 321.93,711.02 328.63,704.31 401.86,704.31 415,717.45 R9.2
NetJ4_A5: J4.A5 R17.2 | length 169.1
  L1 w10: J4.A5 291.62,269.29 300,277.67 310.33,288 379.53,288 394.35,273.17 400,267.55 R17.2
NetJ4_B5: J4.B5 R16.2 | length 167.9
  L1 w10: J4.B5 293.82,151.18 300,145 323,122 374.53,122 380.23,127.71 397.29,127.71 R16.2@400,130.42
NetLED1_2: LED1.2 R24.1 | length 67.9
  L1 w10: LED1.2 1755,760.22 1760.63,765.85 1773.51,765.85 1779.37,771.71 1779.37,777.35 1789.97,787.94 1799.37,787.94 1805,793.58 R24.1
NetLED2_2: LED2.2 R23.1 | length 84.4
  L1 w10: LED2.2 1778.14,221.19 1784,215.33 1784,185.82 1789.86,179.96 R23.1
NetQ1_1: Q1.1 R25.1 | length 137.7
  L1 w10: R25.1@1010,638.21 1034.14,638.21 1040,644.06 1040,705 1047.4,712.4 Q1.1
NetQ2_1: Q2.1 R26.1 | length 55.8
  L1 w10: R26.1 1010.18,842.22 1065.45,842.22 Q2.1
NetR7_2: R7.2 U1.15 | length 193.7
  L1 w10: U1.15 749.86,696.68 749.86,670.86 755.72,665 792.5,665 878.5,579 R7.2
RTS_FTDI: Q1.2 R26.2 U1.19 | length 517.5
  L1 w10: U1.19 863.92,789.68 873.6,780 958.2,780 986.16,807.96 R26.2 1079.21,807.96 1120,767.17 1120,695 1085.52,660.52 1085.52,641.86 Q1.2 ; Q1.2@1065.63,637.6 Q1.2@1067.17,639.14
RXD_FTDI: R12.2 U1.1 | length 1791.1
  L1 w10: U1.1 749.5,842.96 749.5,869.5 v1(770,890) ; v1(1458,663) 1460,661 1460,626.82 1488.82,598 1540.56,598 1919.56,219 1996,219 2010.92,204.08 R12.2
  L4 w10: v1(770,890) 830,890 876.86,843.14 876.86,774.38 840,737.53 840,708 885,663 v1(1458,663)
TXD_FTDI: R13.2 U1.17 | length 1622.5
  L1 w10: U1.17 809.69,750.31 825,735 v1(870,735) ; v1(1500,625) 1500.17,624.83 1536.36,624.83 1926.19,235 2005,235 2050,190 2099.37,190 2105.23,184.14 2105.23,145.19 R13.2@2105.42,145
  L4 w10: v1(870,735) 997,735 1046,686 1484,686 1500,670 v1(1500,625)
U0RXD: J3.6 R13.1 U2.40 | length 690.3
  L1 w10: J3.6 2137.51,52.49 2137.51,142.51 R13.1 ; U2.40 v1(2462.01,310)
  L4 w10: J3.6 2185.03,100 2286.72,100 2351.72,165 2441.72,165 2462.01,185.29 v1(2462.01,310)
U0TXD: J3.7 R12.1 U2.39 | length 676.7
  L1 w10: J3.7 2040.01,54.99 2040.01,140.01 R12.1 ; U2.39 v1@2428.5,267.5
  L4 w10: J3.7 2085.03,100 2156.74,100 2176.74,120 2278.43,120 2343.43,185 2424.15,185 2430.01,190.86 v1(2430.01,272)
VBUS_SENSE: R8.1 R11.2 U1.16 | length 178.3
  L1 w10: U1.16 796.61,730.63 819.35,707.89 819.35,695.65 820,695 840,675 R8.1 R11.2
pads on no net: J1.A8 J1.B8 J2.24 J4.A8 J4.B8 U1.2 U1.4 U1.5 U1.6 U1.7 U1.14

## Polygon pours and split planes (outlines as drawn)
GND on L1 "GND_L01_P008" (solid, remove dead copper, pour order 8): 1188,140 1188,492 1189,493 964,493 878,407 778,407 778,335 766,323 583,323 583,340 574,349 573,348 539,348 497,306 497,233 515,233 518,230 519,231 615,231 617,233 618,232 815,232 885,139 1189,139
GND on L1 "GND_L01_P007" (solid, remove dead copper, pour order 7): 2267,633 2532,632 2532,363 2530,365 2252,365 2252,633 2254,633 2266,633
+5V_VBUS2 on L1 "+5V_VBUS2_L01_P006" (solid, remove dead copper, pour order 6): 337.6,481.3 339.57,483.27 382.87,483.27 437.01,429.13 437.01,305.12 340.55,305.12 340.55,440.94 339.57,440.94 328.74,455.71 328.74,472.44 334.65,477.36 339.57,482.28
+5V_VBUS1 on L1 "+5V_VBUS1_L01_P005" (solid, remove dead copper, pour order 5): 343,538 446,538 447,537 448,538 448,692.91 356.3,692.91 344,680.61 344,592 333,581 333,538.39 342.52,538.39
+5V on L1 "+5V_L01_P004" (solid, remove dead copper, pour order 4): 339.64,530.14 400,534 536,398 606,398 606,411 607,412 608,411 730,411 730,359 522,361.86 392.86,491 329,491 322,496 319,508 322,523.62 331.69,528.54
+3V3_REG on L1 "+3V3_REG_L01_P003" (solid, remove dead copper, pour order 3): 496,225 714,225 722,217 721,216 721,173 694,148 612,148 586,148 474,148 460,162 460,167 480,187 489.62,218.62
+3V3_FTDI on L1 "+3V3_FTDI_L01_P002" (solid, remove dead copper, pour order 2): 583,734 595,722 599.5,717.5 601,710 602,705 611,696 616.6,687.4 625,679 638,666 606,634 574,632 539,597 541,595 541,577 578,577 578,547 554,547 545,556 528,556 518,566 518,607 519,607 556,644 555,645 555,706 567,706 568,705 568,719 582,733 582,734
+3V3_FTDI on L1 "+3V3_FTDI_L01_P001" (solid, remove dead copper, pour order 1): 838,861 911,862 915,793 882,793 881,806 817,806 816,805 814,807 814,846
+3V3 on L2 "+3V3_L02_P009" (solid, remove dead copper, pour order 9): 2461.5,893.5 2436.79,851.58 2436.79,833 2535,833 2543.55,899 2469,899 2467,901
GND on L2 "GND_L02_P000" (solid, remove dead copper, pour order 0): 20,992 21,991 2684,991 2684,19 2685,18 2681,14 12,14
+3V3_REG on L2 "+3V3_REG_L02_P011" (solid, remove dead copper, pour order 11): 483,226 720,226 724,222 724,146 469,146 462,153 462,181 479,198 481,198 481,224
+3V3 on L2 "+3V3_L02_P010" (solid, remove dead copper, pour order 10): 2685,18 2685,990 2684,991 1276,991 1276,629 1379,526 1379,471 1430,471 1434,475 1434,685 1818,685 1824,679 1926,781 1926,783 2478,783 2536,725 2536,187 2491,142 2306,142 2279,115 2279,42 2313,8 2319,14 2685,14
GND on L3 (split plane): 2699.95,0.05 0.05,0.05 0.05,999.95 2699.95,999.95

## Silkscreen, mask and mechanical layers (free items; w line width, h text height)
Top Overlay:
  text "|" at 740,860 h40
  text "|" at 1240,860 h40
  text "|" at 1740,860 h40
  text "|" at 2240,860 h40
  text "J2" at 2270,850 h40
  text "USER" at 1710,670 h40
  text "BOOT/USER" at 1230,560 h40
  text "USB1" at 400,550 h40
  text "UART" at 20,520 h40
  text "+5V" at 407,487 h40
  text "REG" at 1150,470 h40
  text "3V3" at 1460,470 h40
  text "ESP" at 20,430 h40
  text "USB2" at 410,430 h40
  text "RESET" at 1300,380 h40
  text "POWER" at 1730,250 h40
  text "J3" at 2270,110 h40
  text "|" at 730,90 h40
  text "|" at 1230,90 h40
  text "|" at 1730,90 h40
  text "|" at 2230,90 h40
Bottom Overlay:
  text "NC" at 370,880 h40 r90
  text "GND" at 480,880 h40 r90
  text "5V" at 570,880 h40 r90
  text "IO18" at 670,880 h40 r90
  text "IO17" at 780,880 h40 r90
  text "IO16" at 880,880 h40 r90
  text "IO15" at 990,880 h40 r90
  text "IO14" at 1090,880 h40 r90
  text "IO13" at 1180,880 h40 r90
  text "IO12" at 1280,880 h40 r90
  text "IO11" at 1390,880 h40 r90
  text "IO10" at 1480,880 h40 r90
  text "IO9" at 1590,880 h40 r90
  text "IO8" at 1690,880 h40 r90
  text "IO7" at 1790,880 h40 r90
  text "IO6" at 1890,880 h40 r90
  text "IO5" at 1990,880 h40 r90
  text "IO4" at 2080,880 h40 r90
  text "IO3" at 2190,880 h40 r90
  text "IO2" at 2290,880 h40 r90
  text "IO1" at 2390,880 h40 r90
  text "IO0" at 2480,880 h40 r90
  text "3V3" at 2580,880 h40 r90
  text "GND" at 2680,880 h40 r90
  text "<--PIN1-->" at 2680,700 h40 r90
  text "GND" at 370,270 h40 r90
  text "IO47" at 470,270 h40 r90
  text "IO48" at 560,270 h40 r90
  text "USB-" at 660,270 h40 r90
  text "USB+" at 770,270 h40 r90
  text "IO21" at 870,270 h40 r90
  text "IO26" at 980,270 h40 r90
  text "IO33" at 1080,270 h40 r90
  text "IO34" at 1170,270 h40 r90
  text "IO35" at 1270,270 h40 r90
  text "IO36" at 1380,270 h40 r90
  text "IO37" at 1470,270 h40 r90
  text "IO38" at 1580,270 h40 r90
  text "IO39" at 1680,270 h40 r90
  text "IO40" at 1780,270 h40 r90
  text "IO41" at 1880,270 h40 r90
  text "IO42" at 1980,270 h40 r90
  text "TXD" at 2070,270 h40 r90
  text "RXD" at 2180,270 h40 r90
  text "IO45" at 2280,270 h40 r90
  text "IO46" at 2380,270 h40 r90
  text "EN" at 2470,270 h40 r90
  text "GND" at 2570,270 h40 r90
  text "3V3" at 2670,270 h40 r90
Board Shape:
  the board outline again, w20

## Text inside footprints (layer, text, board x,y; h text height)
J6: Top Overlay "1" at 275,535 h40